# Altium PCB ThrowBot_RX_LED_Board.PcbDoc
Units mil, origin at the board's own origin, x right, y up, seen from the top; angles counter-clockwise.
Board outline 2265.03 x 280.03 mil, 2 copper layers (Top Layer, Bottom Layer); 8 components, 9 nets, 19 pads, 0 vias.
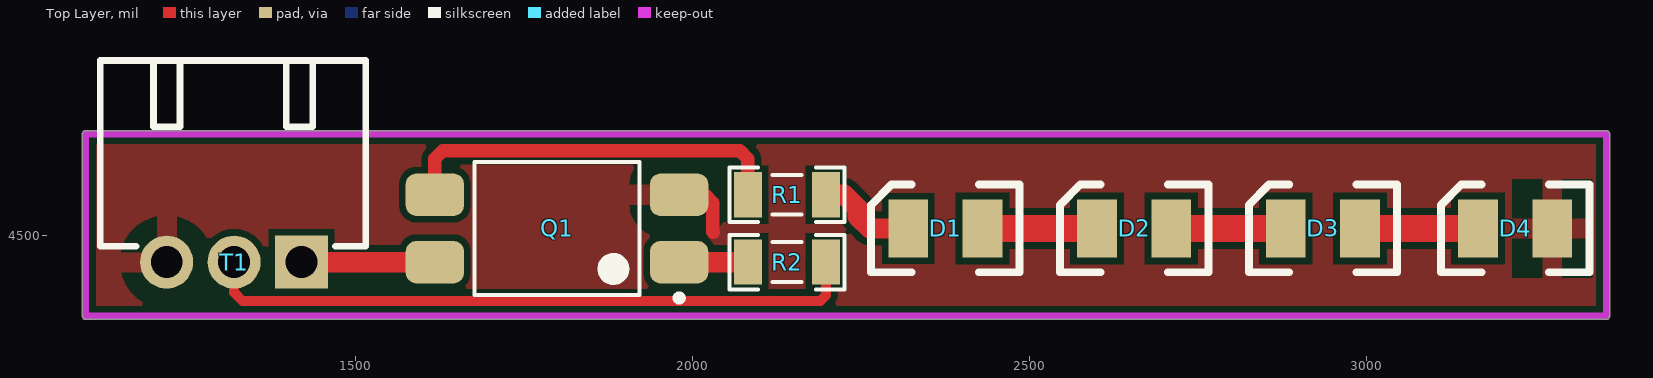
[diagram p0: Top Layer view]
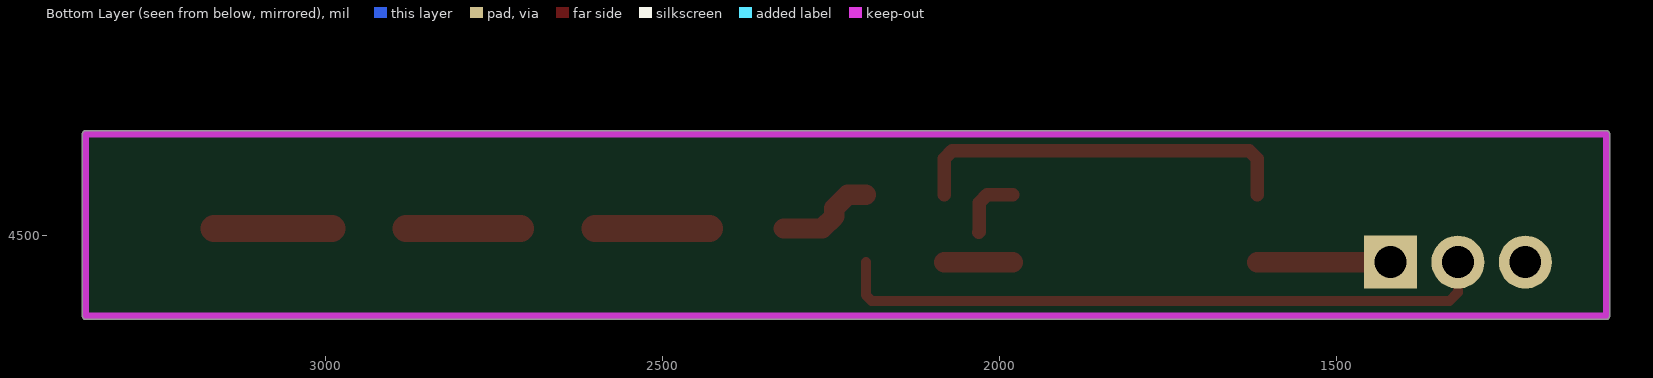
[diagram p1: Bottom Layer view, seen from below]
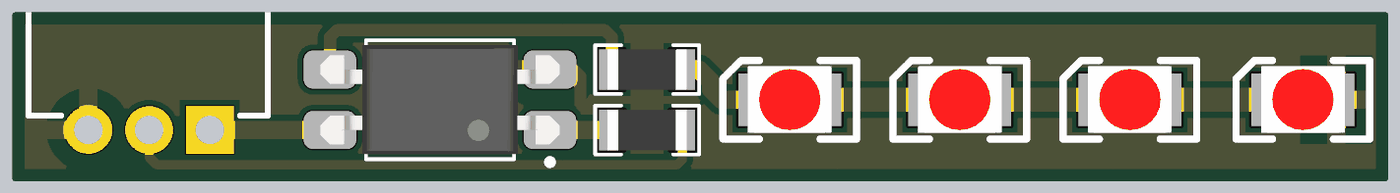
[diagram p2: 3D render of the assembled board from above, using the file's embedded part models]

## Layer stack, top to bottom
Top Solder: solder mask 0.4, Solder Resist, Dk 3.5
Top Layer: signal copper 1.4
Dielectric 1: dielectric 12.6, FR-4, Dk 4.8
Bottom Layer: signal copper 1.4
Bottom Solder: solder mask 0.4, Solder Resist, Dk 3.5

## Board outline
1100,4374.98 cw(c1100,4380) 1094.98,4380 1094.98,4650 cw(c1100,4650) 1100,4655.02 3355,4655.02 cw(c3355,4650) 3360.01,4650 3360.01,4380 cw(c3355,4380) 3355,4374.98

## Design rules (kind name [scope] priority, off if disabled: settings)
Clearance [All] p1: gap=10 ignorepadtopadclearanceinfootprint=FALSE except(0: Arc-Hole Track-Hole SMDPad-Hole THPad-Hole Via-Hole Fill-Hole Poly-Hole Region-Hole Text-Hole; 5: SMDPad-SMDPad)
PolygonConnect [All] p1: connectstyle=Relief reliefconductorwidth=30 reliefentries=4 polygonreliefangle="90 Angle" airgapwidth=30
RoutingVias [All] p1: holewidth=28 width=50 viastyle="Through Hole" minholewidth=28 minwidth=50 maxholewidth=28 maxwidth=50
SolderMaskExpansion [All] p1: expansion=4 istentingtop=FALSE
Width [All] p1: maxlimit=50 minlimit=10 preferedwidth=30
30 further rules are at their usual default settings.

## Components (designator, comment, footprint, x,y, rotation, side; value= is the part's Value field where it differs from the comment)
D1 "LED" "LED 3528" 2430,4509.94 r180 top
D2 "LED" "LED 3528" 2710,4509.94 r180 top
D3 "LED" "LED 3528" 2990,4509.94 r180 top
D4 "LED" "LED 3528" 3275,4509.94 r180 top
Q1 "PC817" PC817 1798.9,4510 r180 top
R1 "Resistor" "RES 1206" 2140,4560 r180 top
R2 "Resistor" "RES 1206" 2140,4460 r0 top
T1 "3 Pin Socket" XH-3AW 1220,4460 r180 top

## Footprints (in the part's own frame and the unit in brackets; to place one, negate y for a bottom-side part, rotate by r counter-clockwise, add the part's x,y. Pads: shape width x height; smd on the part's side, far side on the other; paste and mask are expansions set on the pad)
"LED 3528" [mm]
  rect 1.5x2.2 smd: 1(0,0) 2(2.8,0)
  silkscreen extent -1.39,-1.65 4.19,1.65, body extent -0.35,-1.41 3.15,1.39, height 1.8
PC817 [mm]
  rrect50% 2.2x1.6 smd mask+0.06: 1(-4.6,1.27) 2(-4.6,-1.27) 3(4.6,-1.27) 4(4.6,1.27)
  silkscreen extent -4.73,-2.5 3.1,2.74, body extent -5,-2.29 5,2.29, height 3.89
"RES 1206" [mm]
  rect 1.05x1.7 smd: 1(-1.475,0) 2(1.475,0)
  silkscreen extent -2.17,-1.02 2.17,1.02, body extent -1.65,-0.85 1.65,0.85, height 0.94
XH-3AW [mm]
  rect 2x2 hole 1.2 paste-2539.97 mask+0.051: 1(-5.08,0)
  round 2 hole 1.2 paste-2539.97 mask+0.051: 2(-2.54,0) 3(0,0)
  silkscreen extent -7.5,-7.6 2.5,-0.6

## Part data
D1 D2 D3 D4: Color-1=Blue, Color-2=Red, Color-3=Green, Color-4=White
Q1: "DIP 4pin General Purpose  Photocoupler"
R1: Val-1=1K, Val-2=10K, Val-3=220R, Val-4=100K, Val-5=24.9K, Val-6=8.2K, Val-7=43K, Val-8=150R
R2: Val-1=1K, Val-2=10K, Val-3=220R

## Nets (pads, with @x,y where several pads share a name; then routed paths per layer and width w, separated by ;. In a path a pad name is that pad's centre, name@x,y a point inside that pad or via, vN(x,y) a via of type N, cw(c..) or ccw(c..) an arc to the next point about the centre after c; other vN are vias at no path point)
+12V: Q1.4 T1.1 | length 197.8
  Top Layer w30: T1.1 Q1.4
GND: D4.1 Q1.2 T1.3 | length 99.1
  Top Layer w20: Q1.2 2018.28,4560 2030,4548.28 2030,4504.92 2030.63,4504.29
LED_C: R2.2 T1.2 | length 980.6
  Top Layer w15: T1.2 1320,4415 1332.5,4402.5 2189.28,4402.5 2198.07,4411.29 R2.2
LED_P: Q1.3 R1.2 | length 580.4
  Top Layer w20: Q1.3 1617.8,4613.28 1629.51,4625 2070.21,4625 2081.93,4613.28 R1.2
NetD1_1: D1.1 D2.2 | length 169.8
  Top Layer w40: D1.1 D2.2
NetD1_2: D1.2 R1.1 | length 149.7
  Top Layer w30: R1.1 2225,4560 2245,4540 2245,4527.51 2262.57,4509.94 D1.2
NetD2_1: D2.1 D3.2 | length 169.8
  Top Layer w40: D2.1 D3.2
NetD3_1: D3.1 D4.2 | length 174.8
  Top Layer w40: D3.1 D4.2
NetQ1_1: Q1.1 R2.1 | length 101.9
  Top Layer w30: Q1.1 R2.1

## Polygon pours and split planes (outlines as drawn)
GND on Top Layer "G_Top" (solid, remove dead copper, pour order 0): 1090,4660 3365,4660 3365,4370 1090,4370

## Keep-outs
Keep-Out Layer:
  lines w10: 1100,4380 3355,4380 3355,4650 1100,4650 1100,4380